# Altium PCB MCUBOARD_V1.PcbDoc (part 1 of 2)
Units mm, origin at the board's own origin, x right, y up, seen from the top; angles counter-clockwise.
Board outline 60 x 75 mm, 6 copper layers (GND-SIG1, SIG, GND, PWR, GND-1, GND-SIG2), stack 0.816 mm thick; 132 components, 125 nets, 546 pads, 166 vias.
Unrouted connection lines stored in the file: 93.
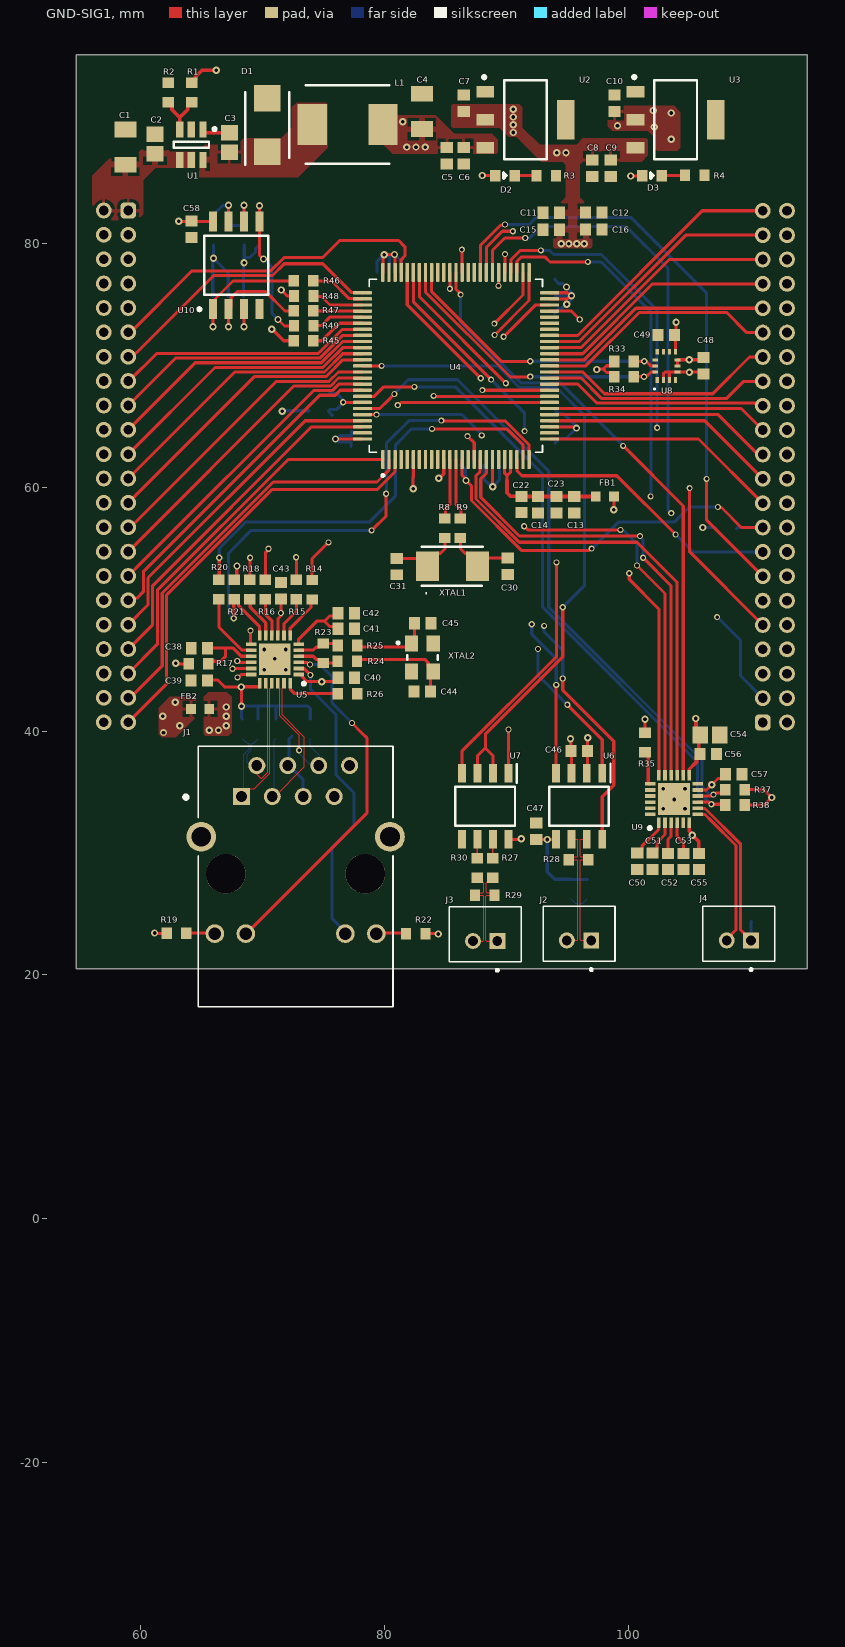
[diagram p0: GND-SIG1 view]
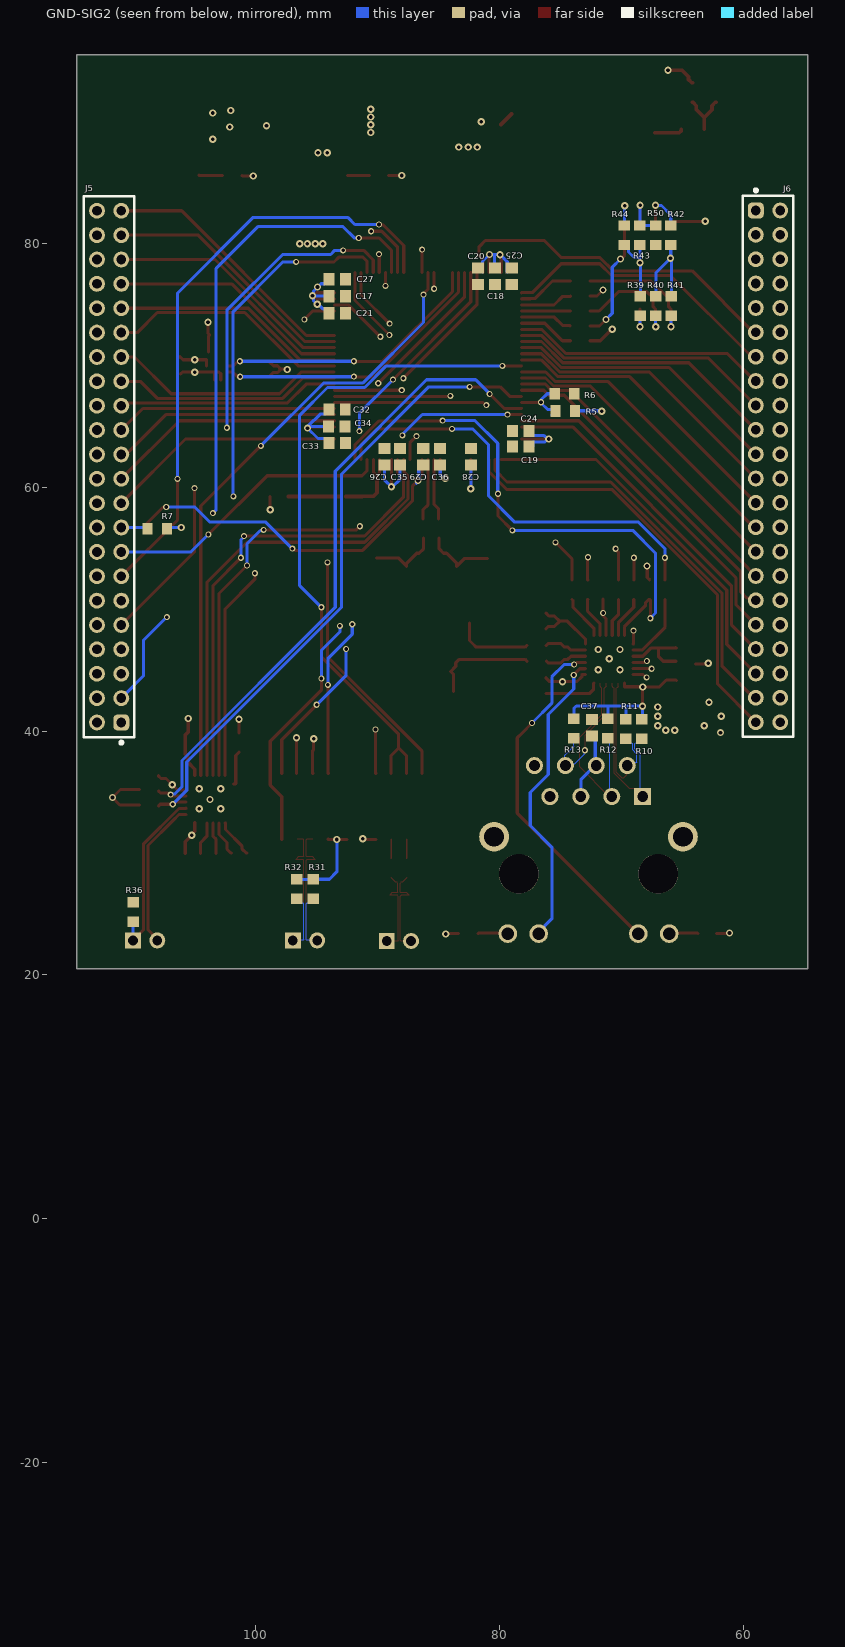
[diagram p1: GND-SIG2 view, seen from below]
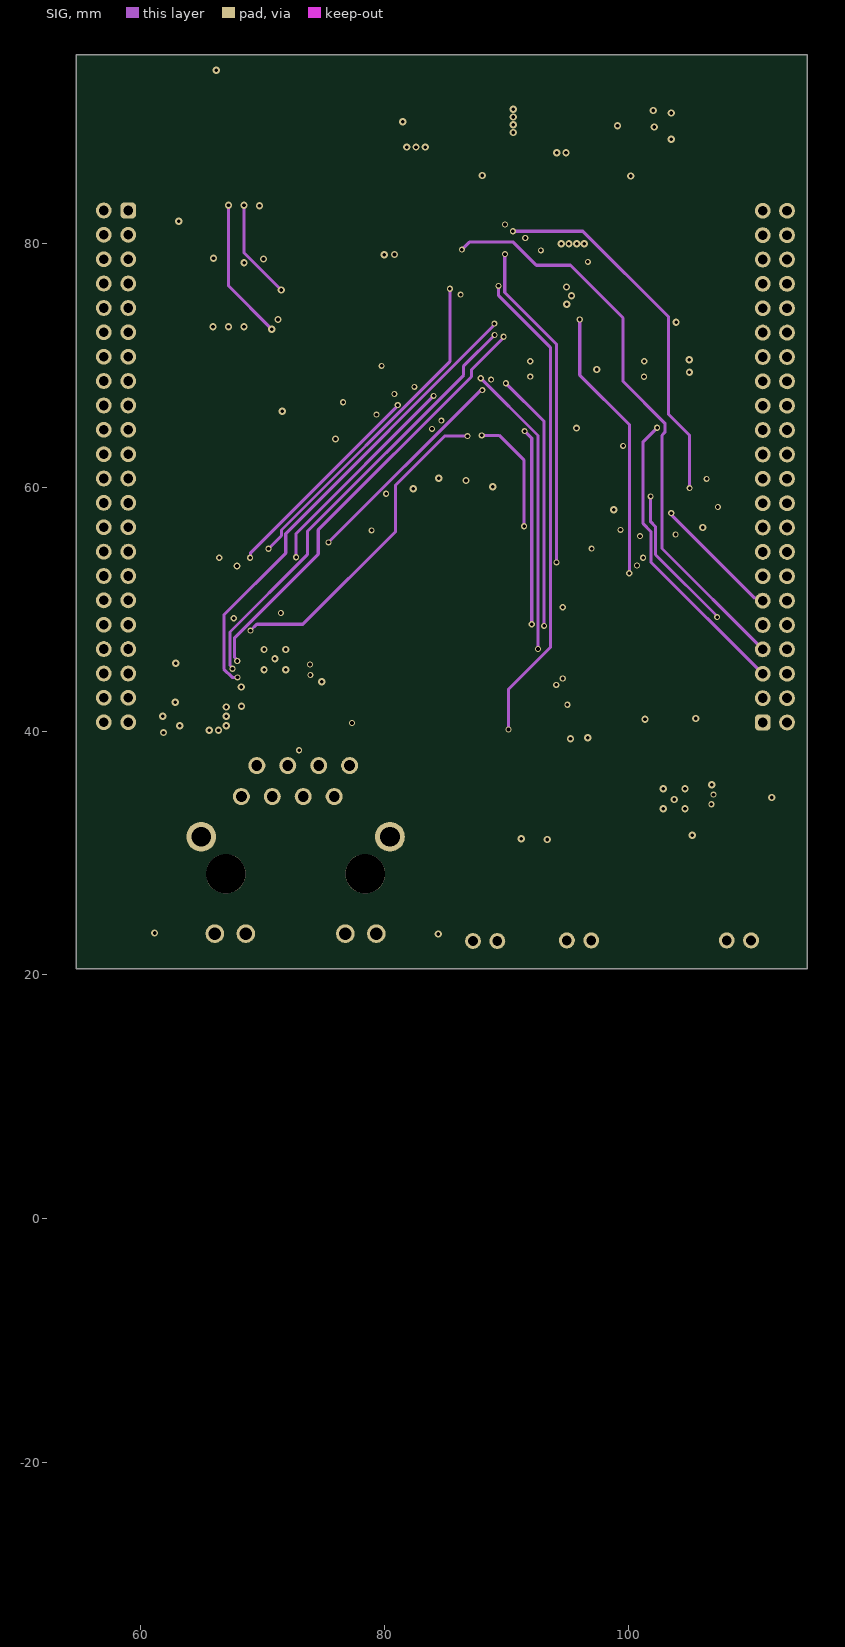
[diagram p2: SIG]
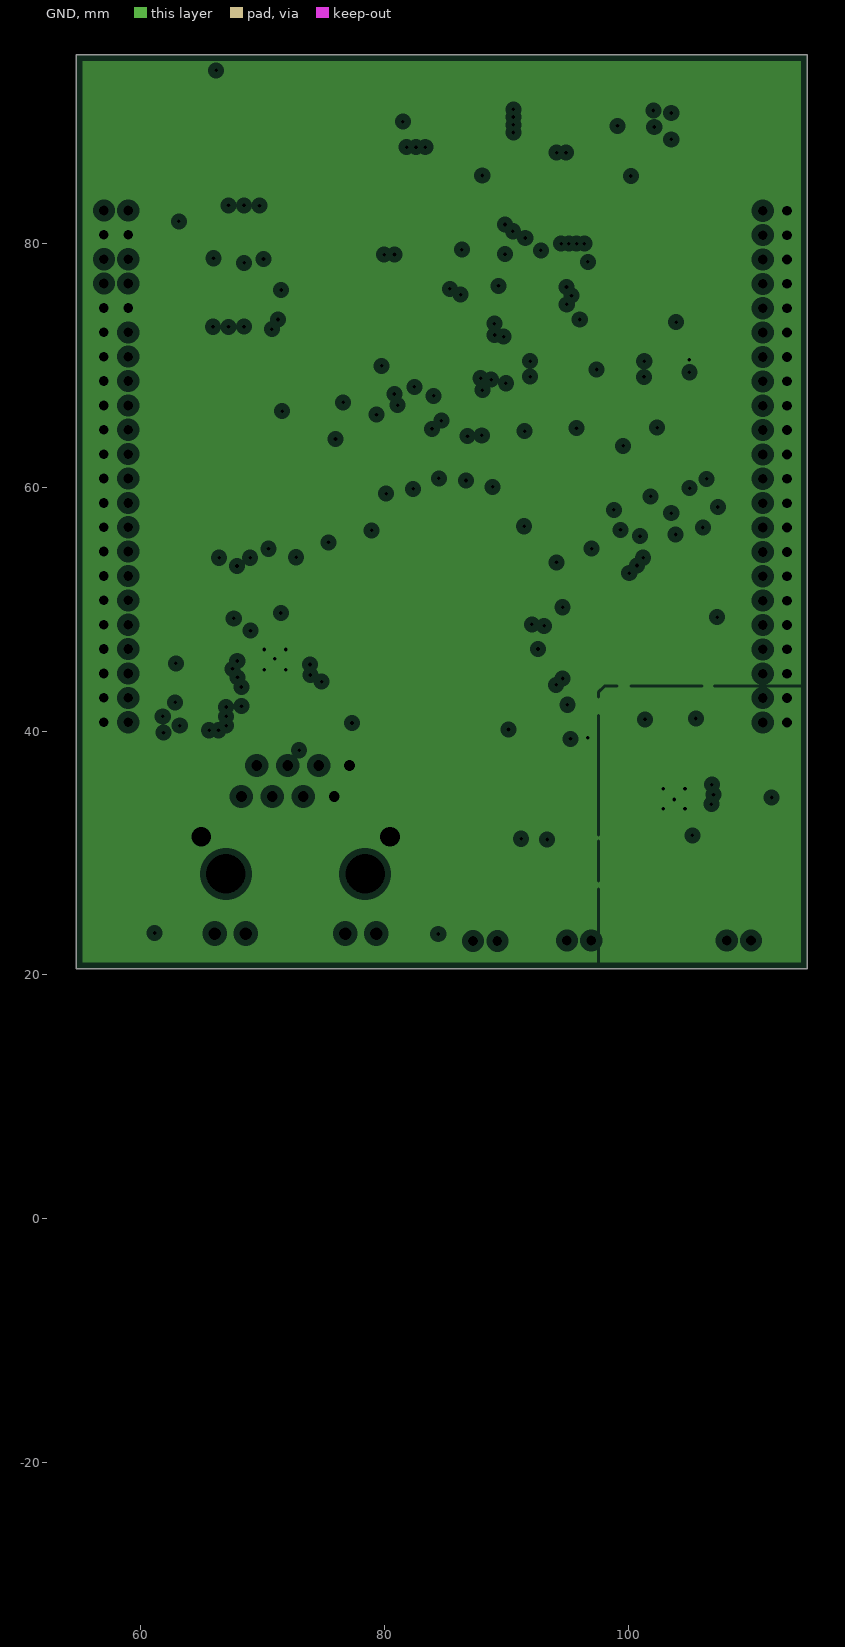
[diagram p3: GND, clearances drawn from the general rule]
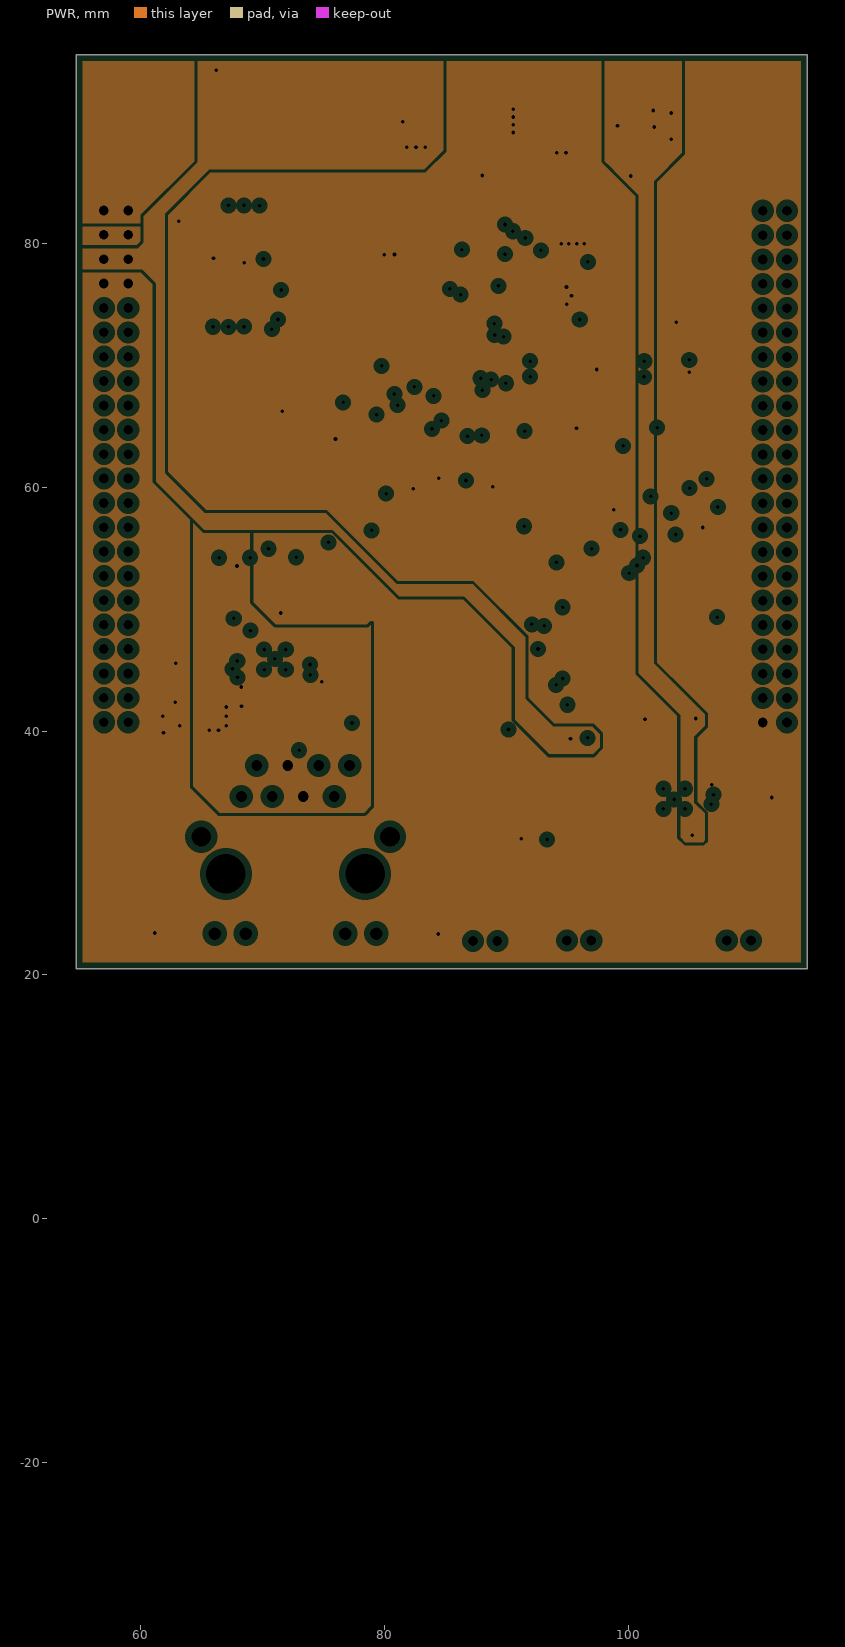
[diagram p4: PWR, clearances drawn from the general rule]
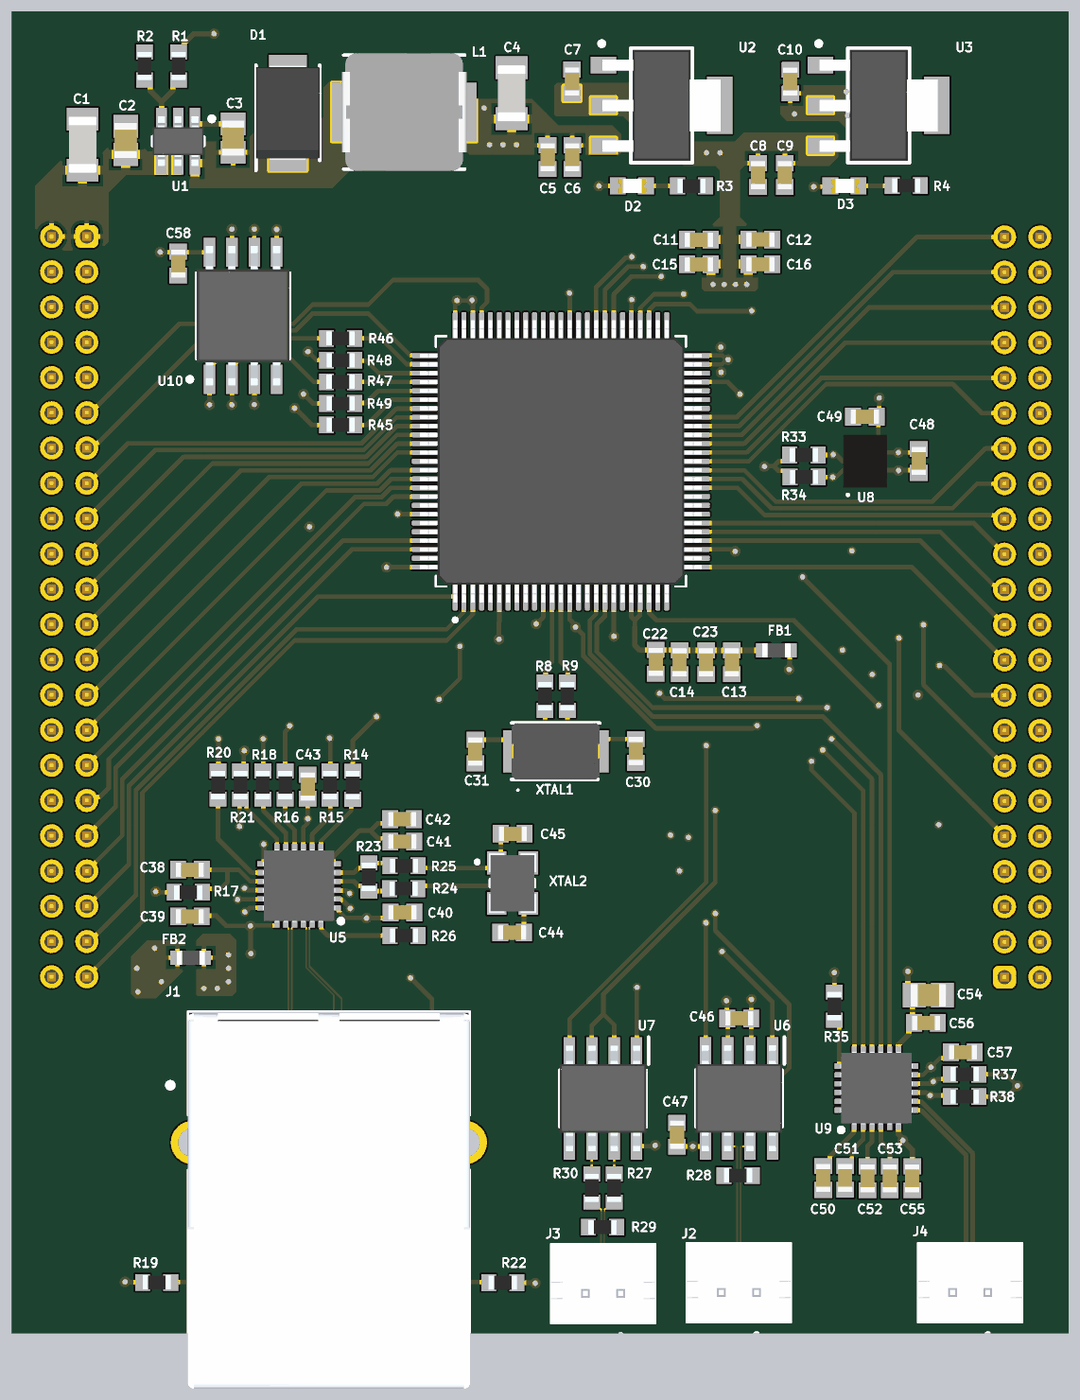
[diagram p6: 3D render of the assembled board from above, using the file's embedded part models]
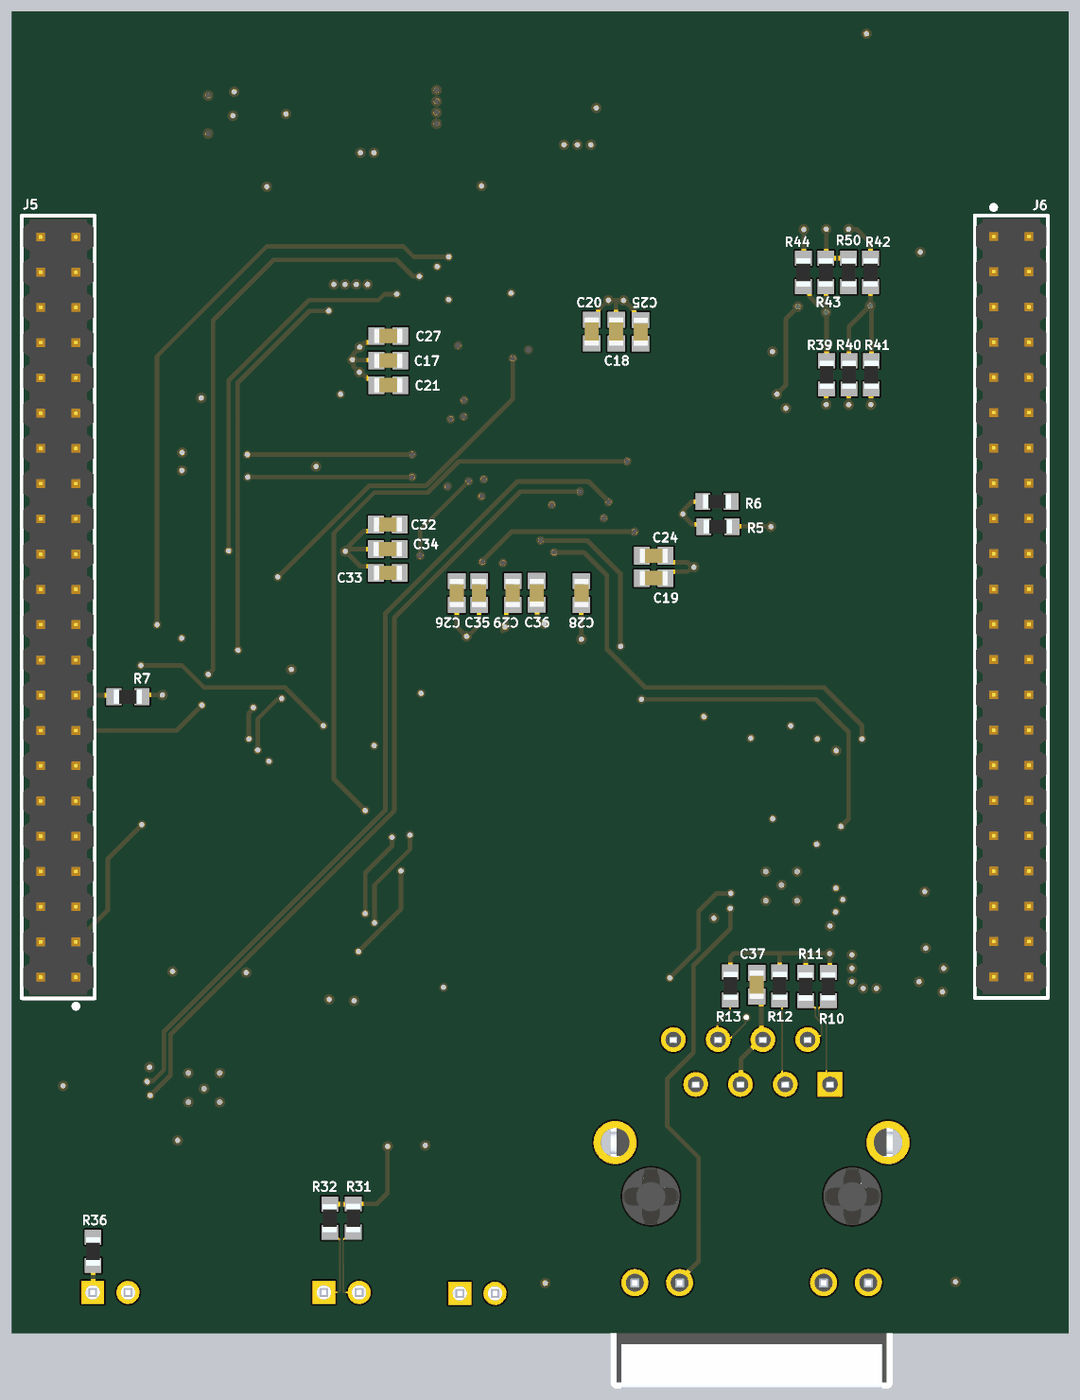
[diagram p7: 3D render of the assembled board from below, using the file's embedded part models]

## Layer stack, top to bottom
Top Solder: solder mask 0.0102, Solder Resist, Dk 3.5
GND-SIG1: signal copper 0.0356
Dielectric 2: prepreg 0.0711, PP-006, Dk 4.1
SIG: signal copper 0.035
Dielectric 4: prepreg 0.0711, PP-006, Dk 4.1
GND: plane copper 0.035, net GND
Dielectric 1: dielectric 0.32, FR-4, Dk 4.8
PWR: plane copper 0.035, net (Multiple Nets)
Dielectric 5: prepreg 0.0711, PP-006, Dk 4.1
GND-1: signal copper 0.035
Dielectric 3: prepreg 0.0711, PP-006, Dk 4.1
GND-SIG2: signal copper 0.0356
Bottom Solder: solder mask 0.0102, Solder Resist, Dk 3.5

## Board outline
54.681,20.504 54.681,95.504 114.681,95.504 114.681,20.504

## Design rules (kind name [scope] priority, off if disabled: settings)
Clearance [All] p1: gap=0.254 ignorepadtopadclearanceinfootprint=FALSE except(0: Arc-Hole Track-Hole SMDPad-Hole THPad-Hole Via-Hole Fill-Hole Poly-Hole Region-Hole Text-Hole; 0.09: Arc-Arc Arc-Track Arc-SMDPad Track-Track Track-SMDPad; 0.1: SMDPad-SMDPad; 0.127: Arc-Via Track-Via SMDPad-Via THPad-Via)
DiffPairsRouting [All] p1: maxlimit=0.127 minlimit=0.09 mostfreqgap=0.127 toplayer_maxgap=0.09 toplayer_prefgap=0.09 toplayer_minwidth=0.093 toplayer_maxwidth=0.093 toplayer_prefwidth=0.093 midlayer1_mingap=0.127 midlayer1_minwidth=0.043 midlayer1_maxwidth=0.043 midlayer1_prefwidth=0.043 midlayer2_mingap=0.127 midlayer2_minwidth=0.043 midlayer2_maxwidth=0.043 midlayer2_prefwidth=0.043 bottomlayer_maxgap=0.09 bottomlayer_prefgap=0.09 bottomlayer_minwidth=0.093 bottomlayer_maxwidth=0.093 bottomlayer_prefwidth=0.093 impedanceprofiledriven=TRUE impedanceprofileid={ACB21D5C-12C8-48E7-B30B-11AA4E9F73A1} impedanceprofilevalue=90.000000 maxuncoupledlength=12.7
HoleSize [All] p1: absolutevalues=TRUE maxlimit=4 minlimit=0.025 maxpercent=80.000 minpercent=20.000
MinimumSolderMaskSliver [All] p1: minsoldermaskwidth=0.001
PlaneClearance [All] p1: clearance=0.508
PlaneConnect [All] p1: planeconnectstyle=Relief reliefexpansion=0.508 reliefentries=4 reliefconductorwidth=0.254 reliefairgap=0.254
PolygonConnect [All] p1: connectstyle=Relief reliefconductorwidth=0.254 reliefentries=4 polygonreliefangle="90 Angle" airgapwidth=0.254
RoutingVias [All] p1: holewidth=0.3 width=0.6 viastyle="Through Hole" minholewidth=0.3 minwidth=0.4 maxholewidth=3 maxwidth=3
SilkToSilkClearance [All] p1: silktosilkclearance=0.15
SilkToSolderMaskClearance [IsPad] p1: minsilkscreentomaskgap=0.01 clearancetoexposedcopper=TRUE
SolderMaskExpansion [All] p1: expansion=0.102 istentingtop=FALSE
Width [All] p1: maxlimit=3 minlimit=0.09 preferedwidth=0.127
23 further rules are at their usual default settings.

## Classes and differential pairs
differential pair class RS485: RS485
differential pair class ETH_TX: ETHTX
differential pair class ETH_RX: ETHRX
differential pair class CAN: CAN
component class "MCU - IMU": C48 C49 R33 R34 U8
component class "MCU - FLASH": C58 R39 R40 R41 R42 R43 R44 R45 R46 R47 R48 R49 R50 U10
component class "MCU - CAN RS485": C46 C47 J2 J3 R27 R28 R29 R30 R31 R32 U6 U7
component class "MCU - AUDIO": C50 C51 C52 C53 C54 C55 C56 C57 J4 R35 R36 R37 R38 U9
component class "Ethernet - LAN8720A": C37 C38 C39 C40 C41 C42 C43 C44 C45 FB2 J1 R10 R11 R12 R13 R14 R15 R16 R17 R18 R19 R20 R21 R22 R23 R24 R25 R26 U5 XTAL2
component class "Connector - Carrier": J5 J6
component class "Power - Regulators": C1 C2 C3 C4 C5 C6 C7 C8 C9 C10 D1 D2 D3 L1 R1 R2 R3 R4 U1 U2 U3
component class "MCU - STM32F407VGT6": C11 C12 C13 C14 C15 C16 C17 C18 C19 C20 C21 C22 C23 C24 C25 C26 C27 C28 C29 C30 C31 C32 C33 C34 C35 C36 FB1 R5 R6 R7 R8 R9 U4 XTAL1
differential pair RS485: +RS485_P -RS485_N
differential pair ETHTX: +ETHTX_P -ETHTX_N
differential pair ETHRX: +ETHRX_P -ETHRX_N
differential pair CAN: +CAN_P -CAN_N

## Components (designator, comment, footprint, x,y, rotation, side; value= is the part's Value field where it differs from the comment)
C1 "4.7 µF 50V" 1206_10uF 58.801,87.884 r90 top
C2 "0.1µF" 0805 61.214,88.265 r270 top
C3 "0.1µF" 0805 67.31,88.392 r270 top
C4 "10µF 50V" 1206_10uF 83.144,90.802 r90 top
C5 "1µF" 0603_Footprint 85.09,87.249 r270 top
C6 "0.1µF" 0603_Footprint 86.487,87.249 r270 top
C7 "0.1µF" 0603_Footprint 86.477,91.547 r270 top
C8 "1µF" 0603_Footprint 97.028,86.233 r270 top
C9 "0.1µF" 0603_Footprint 98.552,86.233 r270 top
C10 "0.1µF" 0603_Footprint 98.861,91.541 r270 top
C11 "4.7µF" 0603_Footprint 93.706,82.56 r180 top
C12 "1µF" 0603_Footprint 97.155,82.55 r0 top
C13 "0.1µF" 0603_Footprint 95.546,58.595 r270 top
C14 "1µF" 0603_Footprint 92.582,58.595 r270 top
C15 "0.1µF" 0603_Footprint 93.706,81.163 r180 top
C16 "0.1µF" 0603_Footprint 97.155,81.153 r0 top
C17 "0.1µF" 0603_Footprint 93.325,75.682 r180 bottom
C18 "0.1µF" 0603_Footprint 80.378,77.356 r270 bottom
C19 "0.1µF" 0603_Footprint 78.223,63.359 r0 bottom
C20 "2.2µF" 0603_Footprint 81.766,77.359 r270 bottom
C21 "2.2µF" 0603_Footprint 93.325,74.285 r180 bottom
C22 "0.1µF" 0603_Footprint 91.223,58.618 r270 top
C23 "1µF" 0603_Footprint 94.081,58.595 r270 top
C24 "0.1µF" 0603_Footprint 78.223,64.629 r0 bottom
C25 "0.1µF" 0603_Footprint 78.994,77.343 r270 bottom
C26 "0.1µF" 0603_Footprint 89.408,62.484 r90 bottom
C27 "0.1µF" 0603_Footprint 93.325,77.079 r180 bottom
C28 "0.1µF" 0603_Footprint 82.328,62.484 r90 bottom
C29 "0.1µF" 0603_Footprint 86.233,62.484 r90 bottom
C30 "18pF" 0603_Footprint 90.089,53.56 r270 top
C31 "18pF" 0603_Footprint 80.989,53.527 r270 top
C32 "0.1µF" 0603_Footprint 93.348,66.378 r180 bottom
C33 "0.1µF" 0603_Footprint 93.345,63.627 r180 bottom
C34 "0.1µF" 0603_Footprint 93.356,64.987 r180 bottom
C35 "0.1µF" 0603_Footprint 88.138,62.484 r90 bottom
C36 "0.1µF" 0603_Footprint 84.869,62.495 r90 bottom
C37 "22nF" 0603_Footprint 72.39,40.259 r90 bottom
C38 "0.1µF" 0603_Footprint 64.82,46.816 r180 top
C39 "0.1µF" 0603_Footprint 64.815,44.162 r180 top
C40 "0.1µF" 0603_Footprint 76.842,44.367 r0 top
C41 "470pF" 0603_Footprint 76.835,48.387 r0 top
C42 "1µF" 0603_Footprint 76.862,49.683 r180 top
C43 "0.1µF" 0603_Footprint 71.492,51.5 r90 top
C44 "18pF" 0603_Footprint 83.103,43.25 r180 top
C45 "18pF" 0603_Footprint 83.103,48.838 r0 top
C46 "0.1µF" 0603_Footprint 95.955,38.359 r0 top
C47 "0.1µF" 0603_Footprint 92.456,31.75 r90 top
C48 "0.1µF" 0603_Footprint 106.172,69.977 r90 top
C49 "0.1µF" 0603_Footprint 103.124,72.517 r180 top
C50 "2.2µF" 0603_Footprint 100.748,29.296 r90 top
C51 "1µF" 0603_Footprint 101.981,29.337 r270 top
C52 "1µF" 0603_Footprint 103.241,29.317 r270 top
C53 "2.2µF" 0603_Footprint 104.531,29.277 r90 top
C54 "10µF" 0805 106.63,39.746 r0 top
C55 "0.1µF" 0603_Footprint 105.781,29.317 r270 top
C56 "1µF" 0603_Footprint 106.553,38.1 r0 top
C57 "1µF" 0603_Footprint 108.648,36.448 r0 top
C58 "0.1µF" 0603_Footprint 64.125,81.213 r270 top
D1 "SS26-E3_52T" DIOM5436X244N 70.358,89.748 r90 top
D2 "LTST-C190KRKT" LEDC1608X80N 89.878,85.598 r180 top
D3 "LTST-C190KRKT" LEDC1608X80N 101.943,85.598 r180 top
FB1 "CB2012-121Y-N" Inductor-0603 98.081,59.248 r0 top
FB2 "CB2012-121Y-N" Inductor-0603 64.846,41.817 r180 top
J1 "HR911105A" HANRUN_HR911105A 72.687,28.278 r180 top
J2 "B2B-PH-K-S" JST_B2B-PH-K-S 95.955,23.373 r0 top
J3 "B2B-PH-K-S" JST_B2B-PH-K-S 88.248,23.319 r0 top
J4 "B2B-PH-K-S" JST_B2B-PH-K-S 109.077,23.373 r0 top
J5 "62004421121" 62004421121 112.03,61.708 r90 bottom
J6 "62004421121" 62004421121 57.95,61.731 r270 bottom
L1 "IHLP2525CZER220M8A" INDPM6965X300N 76.962,89.789 r0 top
R1 "49.9 kOhms" 0603_RES 64.135,92.456 r90 top
R2 "9.53 kOhms" 0603_RES 62.252,92.356 r270 top
R3 "330 Ohms" 0603_RES 93.218,85.575 r180 top
R4 "330 Ohms" 0603_RES 105.403,85.598 r180 top
R5 "0 Ohms" 0603_RES 74.549,66.294 r180 bottom
R6 "0 Ohms" 0603_RES 74.699,67.671 r0 bottom
R7 "4.7 kOhms" 0603_RES 108.031,56.642 r180 bottom
R8 "0 Ohms" 0603_RES 84.926,56.702 r90 top
R9 "0 Ohms" 0603_RES 86.196,56.702 r90 top
R10 "49.9 Ohms" 0603_RES 68.353,40.233 r90 bottom
R11 "49.9 Ohms" 0603_RES 69.643,40.228 r90 bottom
R12 "49.9 Ohms" 0603_RES 71.12,40.259 r90 bottom
R13 "49.9 Ohms" 0603_RES 73.914,40.259 r90 bottom
R14 "10 Ohms" 0603_RES 74.064,51.55 r270 top
R15 "10 Ohms" 0603_RES 72.771,51.562 r270 top
R16 "10 Ohms" 0603_RES 70.231,51.562 r270 top
R17 "4.7 kOhms" 0603_RES 64.659,45.498 r180 top
R18 "10 Ohms" 0603_RES 68.961,51.562 r270 top
R19 "330 Ohms" 0603_RES 62.865,23.368 r180 top
R20 "33 Ohms" 0603_RES 66.421,51.562 r270 top
R21 "1.5 kOhms" 0603_RES 67.691,51.562 r270 top
R22 "330 Ohms" 0603_RES 82.606,23.399 r0 top
R23 "1 MOhms" 0603_RES 74.974,46.343 r270 top
R24 "10 Ohms" 0603_RES 76.978,45.754 r0 top
R25 "0 Ohms" 0603_RES 76.902,47.005 r180 top
R26 "12.1 kOhms" 0603_RES 76.902,43.048 r180 top
R27 "10 Ohms" 0603_RES 88.9,28.702 r270 top
R28 "120 Ohms" 0603_RES 95.957,29.479 r0 top
R29 "100 Ohms" 0603_RES 88.265,26.543 r0 top
R30 "10 Ohms" 0603_RES 87.63,28.702 r270 top
R31 "60 Ohms" 0603_RES 95.313,27.094 r90 bottom
R32 "60 Ohms" 0603_RES 96.604,26.984 r270 bottom
R33 "10 kOhms" 0603_RES 99.695,70.358 r0 top
R34 "10 kOhms" 0603_RES 99.607,69.065 r180 top
R35 "10 kOhms" 0603_RES 101.346,39.116 r90 top
R36 "0 Ohms" 0603_RES 110.036,25.102 r270 bottom
R37 "1.5 kOhms" 0603_RES 108.712,35.179 r180 top
R38 "1.5 kOhms" 0603_RES 108.712,33.909 r180 top
R39 "4.7 kOhms" 0603_RES 68.453,74.93 r90 bottom
R40 "4.7 kOhms" 0603_RES 67.183,74.93 r90 bottom
R41 "4.7 kOhms" 0603_RES 65.913,74.93 r90 bottom
R42 "4.7 kOhms" 0603_RES 65.913,80.645 r270 bottom
R43 "4.7 kOhms" 0603_RES 68.453,80.645 r270 bottom
R44 "4.7 kOhms" 0603_RES 69.723,80.645 r270 bottom
R45 "49.9 kOhms" 0603_RES 73.402,72.064 r0 top
R46 "49.9 kOhms" 0603_RES 73.302,76.926 r180 top
R47 "49.9 kOhms" 0603_RES 73.3,74.463 r180 top
R48 "49.9 kOhms" 0603_RES 73.405,75.732 r0 top
R49 "49.9 kOhms" 0603_RES 73.406,73.279 r0 top
R50 "4.7 kOhms" 0603_RES 67.205,80.745 r90 bottom
U1 "AOZ1282CI" SOT95P280X125-6N 64.135,88.138 r270 top
U2 "AMS1117-3.3" SOT229P700X180-4N 91.567,90.17 r0 top
U3 "AMS1117-1.8" SOT229P700X180-4N 103.886,90.17 r0 top
U4 "STM32F407VGT6" QFP50P1600X1600X160-100N 85.854,69.975 r90 top
U5 "LAN8720ACP" QFN50P400X400X100-25N-D 70.989,45.892 r180 top
U6 "TJA1042T_1J" SOIC127P600X175-8N 95.955,33.832 r270 top
U7 "SN65HVD10DR" SOIC127P600X175-8N 88.246,33.827 r270 top
U8 "LSM6DSOTR" LGA-14(2.5X3X0.86) 103.124,69.977 r90 top
U9 "MAX9860ETG+T" QFN50P400X400X80-25N 103.759,34.417 r90 top
U10 "W25Q16JVSSIQ_TR" SOIC127P790X216-8N 67.818,78.232 r90 top
XTAL1 "ABM3-8.000MHZ-D2Y-T" ABM3 85.561,53.527 r0 top
XTAL2 "ECS-250-18-33-JGN-TR" ECS2501833JGNTR 83.103,46.044 r270 top

## Footprints (in the part's own frame and the unit in brackets; to place one, negate y for a bottom-side part, rotate by r counter-clockwise, add the part's x,y. Pads: shape width x height; smd on the part's side, far side on the other; paste and mask are expansions set on the pad)
0603_Footprint [mm]
  rect 0.9x1 smd: 1(-0.655,0.01) 2(0.695,0.01)
  body extent -0.78,-0.4 0.82,0.42, height 0.82
0603_RES [mm]
  rect 0.85x0.95 smd: 1(-0.85,-0.023) 2(0.75,-0.023)
  body extent -0.85,-0.42 0.75,0.38, height 0.55
0805 [mm]
  rect 1.3x1.4 smd: 1(-0.721,-0.06) 2(0.879,-0.06)
  body extent -0.92,-0.7 1.08,0.58, height 1.26
1206_10uF [mm]
  rect 1.3x1.8 smd: 1(-1.394,0.086) 2(1.506,0.086)
  body extent -1.54,-0.71 1.66,0.89, height 0.8
62004421121 [mm] "2.00 mm THT Dual Pin Header, 44p"
  rrect50% 1.3x1.3 hole 0.8: 1(-21,-1)
  round 1.3 hole 0.8: 2(-21,1) 3(-19,-1) 4(-19,1) 5(-17,-1) 6(-17,1) 7(-15,-1) 8(-15,1) 9(-13,-1) 10(-13,1) 11(-11,-1) 12(-11,1) 13(-9,-1) 14(-9,1) 15(-7,-1) 16(-7,1) 17(-5,-1) 18(-5,1) 19(-3,-1) 20(-3,1) 21(-1,-1) 22(-1,1) 23(1,-1) 24(1,1) 25(3,-1) 26(3,1) 27(5,-1) 28(5,1) 29(7,-1) 30(7,1) 31(9,-1) 32(9,1) 33(11,-1) 34(11,1) 35(13,-1) 36(13,1) 37(15,-1) 38(15,1) 39(17,-1) 40(17,1) 41(19,-1) 42(19,1) 43(21,-1) 44(21,1)
  silkscreen extent -22.77,-2.07 22.2,2.07, body extent -22,-2 22,2, height 6.05
ABM3 [mm]
  rect 1.9x2.4 smd: 1(-2.05,0) 2(2.05,0)
  silkscreen extent -2.5,-2.25 2.5,1.6, body extent -2.5,-1.6 2.5,1.6, height 1.3
DIOM5436X244N [mm]
  rect 2.2x2.15 smd: 1(-2.2,0) 2(2.2,0)
  silkscreen extent -3.27,-1.81 2.7,1.81, body extent -2.7,-1.81 2.7,1.81, height 2.44
ECS2501833JGNTR [mm]
  rect 1.3x1.1 smd: 1(-1.15,-0.9) 2(1.15,-0.9) 3(1.15,0.9) 4(-1.15,0.9)
  silkscreen extent -1.3,-2.1 0.2,1.25, body extent -1.69,-1.34 1.69,1.34, height 0.9
HANRUN_HR911105A [mm]
  rect 1.398x1.398 / inner round 1.398 / far side rect 1.398x1.398 hole 0.89: 1(4.45,-6.35)
  round 1.398 hole 0.89: 2(3.18,-8.89) 3(1.91,-6.35) 4(0.64,-8.89) 5(-0.63,-6.35) 6(-1.9,-8.89) 7(-3.17,-6.35) 8(-4.44,-8.89)
  round 1.53 hole 1.02: 9(6.625,4.9) 10(4.085,4.9) 11(-4.085,4.9) 12(-6.625,4.9)
  round 2.445 hole 1.63: 15(7.745,-3.05) 16(-7.745,-3.05)
  round 3.25 hole 3.25 unplated: ""(-5.715,0) ""(5.715,0)
  silkscreen extent -8,-10.48 9.15,10.92, body extent -8.02,-10.38 8.02,10.92, height 13.5
INDPM6965X300N [mm]
  rect 2.4x3.35 smd: 1(-2.9,0) 2(2.9,0)
  silkscreen extent -3.43,-3.23 3.43,3.23, body extent -3.54,-3.33 3.53,3.34, height 2.89
Inductor-0603 [mm]
  rect 0.8x0.8 smd: 1(-0.75,0) 2(0.75,0)
  body extent -0.8,-0.4 0.8,0.4, height 0.55
JST_B2B-PH-K-S [mm]
  rect 1.308x1.308 / inner round 1.308 / far side rect 1.308x1.308 hole 0.8: 1(1,-0.55)
  round 1.308 hole 0.8: 2(-1,-0.55)
  silkscreen extent -2.95,-3.05 2.95,2.25, body extent -2.95,-2.25 2.95,2.25, height 6
LEDC1608X80N [mm]
  rect 0.9x0.95 smd: 1(-0.8,0) 2(0.8,0)
  silkscreen extent -0.13,-0.25 0.13,0.25, body extent -0.83,-0.4 0.77,0.4, height 0.8
LGA-14(2.5X3X0.86) [mm]
  rect 0.475x0.25 smd: 1(-1.162,0.75) 2(-1.162,0.25) 3(-1.162,-0.25) 4(-1.162,-0.75) 8(1.162,-0.75) 9(1.162,-0.25) 10(1.162,0.25) 11(1.162,0.75)
  rect 0.25x0.475 smd: 5(-0.5,-0.913) 6(0,-0.913) 7(0.5,-0.913) 12(0.5,0.913) 13(0,0.913) 14(-0.5,0.913)
  silkscreen extent -1.93,0.95 -1.88,1.01, body extent -1.5,-1.25 1.5,1.25, height 0.86
QFN50P400X400X80-25N [mm]
  rect 0.85x0.3 smd: 1(-1.95,1.25) 2(-1.95,0.75) 3(-1.95,0.25) 4(-1.95,-0.25) 5(-1.95,-0.75) 6(-1.95,-1.25) 13(1.95,-1.25) 14(1.95,-0.75) 15(1.95,-0.25) 16(1.95,0.25) 17(1.95,0.75) 18(1.95,1.25)
  rect 0.3x0.85 smd: 7(-1.25,-1.95) 8(-0.75,-1.95) 9(-0.25,-1.95) 10(0.25,-1.95) 11(0.75,-1.95) 12(1.25,-1.95) 19(1.25,1.95) 20(0.75,1.95) 21(0.25,1.95) 22(-0.25,1.95) 23(-0.75,1.95) 24(-1.25,1.95)
  rect 2.63x2.63 smd: 25(0,0)
  silkscreen extent -2.5,1.88 -2.25,2.12, body extent -2.05,-2.05 2.05,2.05, height 0.8
QFN50P400X400X100-25N-D [mm]
  rect 0.85x0.3 smd: 1(-1.95,1.25) 2(-1.95,0.75) 3(-1.95,0.25) 4(-1.95,-0.25) 5(-1.95,-0.75) 6(-1.95,-1.25) 13(1.95,-1.25) 14(1.95,-0.75) 15(1.95,-0.25) 16(1.95,0.25) 17(1.95,0.75) 18(1.95,1.25)
  rect 0.3x0.85 smd: 7(-1.25,-1.95) 8(-0.75,-1.95) 9(-0.25,-1.95) 10(0.25,-1.95) 11(0.75,-1.95) 12(1.25,-1.95) 19(1.25,1.95) 20(0.75,1.95) 21(0.25,1.95) 22(-0.25,1.95) 23(-0.75,1.95) 24(-1.25,1.95)
  rect 2.6x2.6 smd: 25(0,0)
  silkscreen extent -2.5,1.88 -2.25,2.12, body extent -2.05,-2.05 2.05,2.05, height 1
QFP50P1600X1600X160-100N [mm]
  rrect50% 1.56x0.28 smd: 1(-7.68,6) 2(-7.68,5.5) 3(-7.68,5) 4(-7.68,4.5) 5(-7.68,4) 6(-7.68,3.5) 7(-7.68,3) 8(-7.68,2.5) 9(-7.68,2) 10(-7.68,1.5) 11(-7.68,1) 12(-7.68,0.5) 13(-7.68,0) 14(-7.68,-0.5) 15(-7.68,-1) 16(-7.68,-1.5) 17(-7.68,-2) 18(-7.68,-2.5) 19(-7.68,-3) 20(-7.68,-3.5) 21(-7.68,-4) 22(-7.68,-4.5) 23(-7.68,-5) 24(-7.68,-5.5) 25(-7.68,-6) 51(7.68,-6) 52(7.68,-5.5) 53(7.68,-5) 54(7.68,-4.5) 55(7.68,-4) 56(7.68,-3.5) 57(7.68,-3) 58(7.68,-2.5) 59(7.68,-2) 60(7.68,-1.5) 61(7.68,-1) 62(7.68,-0.5) 63(7.68,0) 64(7.68,0.5) 65(7.68,1) 66(7.68,1.5) 67(7.68,2) 68(7.68,2.5) 69(7.68,3) 70(7.68,3.5) 71(7.68,4) 72(7.68,4.5) 73(7.68,5) 74(7.68,5.5) 75(7.68,6)
  rrect50% 0.28x1.56 smd: 26(-6,-7.68) 27(-5.5,-7.68) 28(-5,-7.68) 29(-4.5,-7.68) 30(-4,-7.68) 31(-3.5,-7.68) 32(-3,-7.68) 33(-2.5,-7.68) 34(-2,-7.68) 35(-1.5,-7.68) 36(-1,-7.68) 37(-0.5,-7.68) 38(0,-7.68) 39(0.5,-7.68) 40(1,-7.68) 41(1.5,-7.68) 42(2,-7.68) 43(2.5,-7.68) 44(3,-7.68) 45(3.5,-7.68) 46(4,-7.68) 47(4.5,-7.68) 48(5,-7.68) 49(5.5,-7.68) 50(6,-7.68) 76(6,7.68) 77(5.5,7.68) 78(5,7.68) 79(4.5,7.68) 80(4,7.68) 81(3.5,7.68) 82(3,7.68) 83(2.5,7.68) 84(2,7.68) 85(1.5,7.68) 86(1,7.68) 87(0.5,7.68) 88(0,7.68) 89(-0.5,7.68) 90(-1,7.68) 91(-1.5,7.68) 92(-2,7.68) 93(-2.5,7.68) 94(-3,7.68) 95(-3.5,7.68) 96(-4,7.68) 97(-4.5,7.68) 98(-5,7.68) 99(-5.5,7.68) 100(-6,7.68)
  silkscreen extent -9.1,-7.1 7.1,7.1, body extent -8,-8 8,8, height 1.59
SOIC127P600X175-8N [mm]
  rect 1.525x0.65 smd: 1(-2.712,1.905) 2(-2.712,0.635) 3(-2.712,-0.635) 4(-2.712,-1.905) 5(2.712,-1.905) 6(2.712,-0.635) 7(2.712,0.635) 8(2.712,1.905)
  silkscreen extent -3.47,-2.45 1.6,2.58, body extent -3,-2.45 3,2.45, height 1.75
SOIC127P790X216-8N [mm]
  rect 1.65x0.65 smd: 1(-3.6,1.905) 2(-3.6,0.635) 3(-3.6,-0.635) 4(-3.6,-1.905) 5(3.6,-1.905) 6(3.6,-0.635) 7(3.6,0.635) 8(3.6,1.905)
  silkscreen extent -3.73,-2.64 2.42,3.15, body extent -3.95,-2.64 3.95,2.64, height 2.16
SOT95P280X125-6N [mm]
  rect 1.3x0.6 smd: 1(-1.25,0.95) 2(-1.25,0) 3(-1.25,-0.95) 4(1.25,-0.95) 5(1.25,0) 6(1.25,0.95)
  silkscreen extent -1.4,-1.45 0.25,2.03, body extent -1.4,-1.45 1.4,1.45, height 1.25
SOT229P700X180-4N [mm]
  rect 1.45x0.95 smd: 1(-3.3,2.29) 2(-3.3,0) 3(-3.3,-2.29)
  rect 1.45x3.25 smd: 4(3.3,0)
  silkscreen extent -3.53,-3.25 1.75,3.63, body extent -3.35,-3.15 3.35,3.15, height 1.8

## Part data
C1: library part "4.7 uF 50V 1206", "10 uF 50V 1206"
C2 C3: library part "0.1uF 0805 Surface Capacitor", "0.1uF 0805 Surface Capacitor"
C4: library part "10 uF 50V 1206", "10 uF 50V 1206"
C5 C8 C12 C14 C23 C42 C51 C52 C56 C57: library part "1uF 0603 Surface Capacitor", "1uF 0603 Surface Capacitor"
C6 C7 C9 C10 C13 C15 C16 C17 C18 C19 C22 C24 C25 C26 C27 C28 C29 C32 C33 C34 C35 C36 C46 C47 C58: library part "0.1uF 0603 Surface Capacitor", "0.1uF 0603 Surface Capacitor"
C11: library part "4.7uF 0603 Surface Capacitor", "4.7uF 0603 Surface Capacitor"
C20 C21 C50 C53: library part "2.2uF 0603 Surface Capacitor", "2.2uF 0603 Surface Capacitor"
C30 C31 C44 C45: library part "18pF 0603 Surface Capacitor", "18pF 0603 Surface Capacitor"
C37: library part "22nF 0603", "22nF 0603 Surface Capacitor"
C38 C39 C40 C43 C48 C49 C55: library part "0.1uF 0603 Surface Capacitor_1_1_1_1_1_1", "0.1uF 0603 Surface Capacitor"
C41: library part "470 pF 0603 Surface Capacitor", "470 pF 0603 Surface Capacitor"
C54: library part "10uF 0805 Surface Capacitor", "10uF 0805 Surface Capacitor"
D1: "Schottky Diode", Arrow Part Number=SS26-E3/52T, Manufacturer_Name=Vishay, Mouser Part Number=625-SS26-E3, Arrow Price/Stock=https://www.arrow.com/en/products/ss26-e352t/vishay?region=europe, Datasheet Link=https://componentsearchengine.com/Datasheets/2/SS26-E3_52T.pdf, Height=2.44mm, Manufacturer_Part_Number=SS26-E3/52T, Mouser Price/Stock=https://www.mouser.co.uk/ProductDetail/Vishay-General-Semiconductor/SS26-E3-52T?qs=x2jpVgRnAtNToatHaCRUvw%3D%3D
D2 D3: "LED", Manufacturer_Name=Lite-On, Mouser Part Number=859-LTST-C190KRKT, Arrow Part Number=LTST-C190KRKT, Arrow Price/Stock=https://www.arrow.com/en/products/ltst-c190krkt/lite-on-technology?region=europe, Datasheet Link=https://componentsearchengine.com/Datasheets/1/LTST-C190KRKT.pdf, Height=0.8mm, Manufacturer_Part_Number=LTST-C190KRKT, Mouser Price/Stock=https://www.mouser.co.uk/ProductDetail/Lite-On/LTST-C190KRKT?qs=kAD5fFa1n5VY3YYNWPC1Fg%3D%3D
J1: "DIP RJ45 Connector;", Package=None, Availability="Not in stock", Check_prices=https://www.snapeda.com/parts/HR911105A/HanRun/view-part/?ref=eda, MF=hanrun, MP=HR911105A, Price=None, SnapEDA_Link=https://www.snapeda.com/parts/HR911105A/HanRun/view-part/?ref=snap
J2 J3 J4: "Connector Header Through Hole 2 position 0.079 (2.00mm)", Package=None, Check_prices=https://www.snapeda.com/parts/B2B-PH-K-S/JST/view-part/?ref=eda, MF="JST Sales America Inc.", MP=B2B-PH-K-S, SnapEDA_Link=https://www.snapeda.com/parts/B2B-PH-K-S/JST/view-part/?ref=snap
J5 J6: "WR-PHD Pin Header, THT, Vertical, pitch 2mm, 2 Row, 44P", Contact Resistance=20mOhm, Manufacturer="Wurth Elektronik", Operating Temperature Max=105°C, Operating Temperature Min=-40°C, Rated Current=2A, Withstanding Voltage=500V, Working Voltage=200V, Category="Board-to-Board Connectors", ComponentLink1Description="Website Link", ComponentLink1URL=https://www.we-online.com/redexpert/article/62004421121?ad, ComponentLink2Description="Datasheet Link", ComponentLink2URL=https://www.we-online.com/redexpert/spec/62004421121?ad, Gender="Pin Header", Manufacturer Part Number=62004421121, Match Code=WR-PHD, Mount="Through Hole", Number of Pins=44, Number of Rows=2, Orientation=Vertical, Packaging=Bag, Pitch=2mm
L1: "Inductor", Manufacturer_Name=Vishay, Mouser Part Number=70-IHLP2525CZR220M8A, Arrow Part Number=IHLP2525CZER220M8A, Arrow Price/Stock=https://www.arrow.com/en/products/ihlp2525czer220m8a/vishay, Datasheet Link=https://componentsearchengine.com/Datasheets/2/IHLP2525CZER220M8A.pdf, Height=3mm, Manufacturer_Part_Number=IHLP2525CZER220M8A, Mouser Price/Stock=https://www.mouser.co.uk/ProductDetail/Vishay-Dale/IHLP2525CZER220M8A?qs=ei%2FvZTf36ZyKyW60gc1ORQ%3D%3D
R1 R45 R46 R47 R48 R49: library part "49.9 kOhms 0603", "49.9 kOhms 0603"
R2: library part "9.53 kOhms 0603", "9.53 kOhms 0603"
R3 R4 R19 R22: library part "330 Ohm 0603", "330 Ohm 0603"
R5 R6 R8 R9 R25 R36: library part "0 Ohm 0603", "0 Ohm 0603"
R7 R17 R39 R40 R41 R42 R43 R44 R50: library part "4.7 kOhms 0603", "4.7 kOhms 0603"
R10 R11 R12 R13: library part "49.9 Ohms 0603", "49.9 Ohms 0603"
R14 R15 R16 R18 R24 R27 R30: library part "10 Ohm 0603", "10 Ohms 0603"
R20: library part "33 Ohm 0603", "33 Ohm 0603"
R21 R37 R38: library part "1.5 kOhms 0603", "1.5 kOhms 0603"
R23: library part "1 MOhms 0603", "1 MOhms 0603"
R26: library part "12.1 kOhms 0603", "12.1 kOhms 0603"
R28: library part "120 Ohm 0603", "120 Ohm 0603"
R29: library part "100 Ohm 0603", "100 Ohm 0603"
R31 R32: library part "60 Ohm 0603", "60 Ohm 0603"
R33 R34 R35: library part "10 kOhms 0603", "10 kOhms 0603"
U1: "Integrated Circuit", Manufacturer_Name="Alpha & Omega Semiconductors", Arrow Part Number=AOZ1282CI, Arrow Price/Stock=https://www.arrow.com/en/products/aoz1282ci/alpha-and-omega-semiconductor?region=nac, Datasheet Link=http://www.aosmd.com/res/data_sheets/AOZ1282CI.pdf, Height=1.25mm, Manufacturer_Part_Number=AOZ1282CI
U2: "Integrated Circuit", Manufacturer_Name=Advanced, Datasheet Link=https://datasheet.datasheetarchive.com/originals/distributors/Datasheets-28/DSA-550594.pdf, Height=1.8mm, Manufacturer_Part_Number=AMS1117-3.3
U3: "Integrated Circuit", Manufacturer_Name="Advanced Monolithic Systems", Datasheet Link=https://datasheet.datasheetarchive.com/originals/distributors/Datasheets-1/DSA-6085.pdf, Height=1.8mm, Manufacturer_Part_Number=AMS1117-1.8
U4: "STM32 Series 32-bit 1 MB Flash 192 kB RAM ARM Based Microcontroller - LQFP-100", Package=None, Availability=Unavailable, MP=STM32F407VGT6, Price=None
U5: "Ethernet Transreceiver", Manufacturer_Name=Microchip, Datasheet Link=http://ww1.microchip.com/downloads/en/DeviceDoc/8720a.pdf, Height=1mm, Manufacturer_Part_Number=LAN8720ACP
U6: "Integrated Circuit", Arrow Part Number=TJA1042T/1J, Manufacturer_Name=NXP, Mouser Part Number=771-TJA1042T/1J, Arrow Price/Stock=https://www.arrow.com/en/products/tja1042t1j/nxp-semiconductors?region=nac, Datasheet Link=http://www.nxp.com/docs/en/data-sheet/TJA1042.pdf, Height=1.75mm, Manufacturer_Part_Number=TJA1042T/1J, Mouser Price/Stock=https://www.mouser.co.uk/ProductDetail/NXP-Semiconductors/TJA1042T-1J?qs=gNSudQoqUYB5nZpx0evBtw%3D%3D
U7: "Integrated Circuit", Manufacturer_Name="Texas Instruments", Mouser Part Number=595-SN65HVD10DR, Arrow Part Number=SN65HVD10DR, Arrow Price/Stock=https://www.arrow.com/en/products/sn65hvd10dr/texas-instruments?region=nac, Datasheet Link=http://www.ti.com/lit/gpn/sn65hvd10, Height=1.75mm, Manufacturer_Part_Number=SN65HVD10DR, Mouser Price/Stock=https://www.mouser.co.uk/ProductDetail/Texas-Instruments/SN65HVD10DR?qs=QViXGNcIEAviyhAwS0yoXQ%3D%3D
U8: "Accelerometer", Manufacturer_Name=STMicroelectronics, Mouser Part Number=511-LSM6DSOTR, Arrow Part Number=LSM6DSOTR, Arrow Price/Stock=https://www.arrow.com/en/products/lsm6dsotr/stmicroelectronics?region=nac, Datasheet Link=https://www.st.com/resource/en/datasheet/lsm6dso.pdf, Manufacturer_Part_Number=LSM6DSOTR, Mouser Price/Stock=https://www.mouser.co.uk/ProductDetail/STMicroelectronics/LSM6DSOTR?qs=lc2O%252BfHJPVbD197C5c7oNw%3D%3D
U9: "Integrated Circuit", Manufacturer_Name="Analog Devices", Mouser Part Number=700-MAX9860ETGT, Arrow Part Number=MAX9860ETG+T, Arrow Price/Stock=https://www.arrow.com/en/products/max9860etgt/maxim-integrated?region=nac, Datasheet Link=https://datasheets.maximintegrated.com/en/ds/MAX9860.pdf, Height=0.8mm, Manufacturer_Part_Number=MAX9860ETG+T, Mouser Price/Stock=https://www.mouser.co.uk/ProductDetail/Analog-Devices-Maxim-Integrated/MAX9860ETG%2bT?qs=LHmEVA8xxfYGy2Ln2j7A4Q%3D%3D
U10: "Integrated Circuit", Arrow Part Number="W25Q16JVSSIQ TR", Manufacturer_Name=Winbond, Mouser Part Number=454-W25Q16JVSSIQTR, Arrow Price/Stock=https://www.arrow.com/en/products/w25q16jvssiqtr/winbond-electronics?region=nac, Datasheet Link=https://www.winbond.com/resource-files/w25q16jv%20spi%20revg%2003222018%20plus.pdf, Height=2.16mm, Manufacturer_Part_Number="W25Q16JVSSIQ TR", Mouser Price/Stock=https://www.mouser.co.uk/ProductDetail/Winbond/W25Q16JVSSIQ-TR?qs=qSfuJ%252Bfl%2Fd6oXlsNm7Svfg%3D%3D
XTAL1: "Crystal or Oscillator", Manufacturer_Name=ABRACON, Mouser Part Number=815-ABM3-8-D2Y-T, Arrow Part Number=ABM3-8.000MHZ-D2Y-T, Arrow Price/Stock=https://www.arrow.com/en/products/abm3-8.000mhz-d2y-t/abracon?region=europe, Datasheet Link=https://abracon.com/Resonators/abm3.pdf, Height=1.3mm, Manufacturer_Part_Number=ABM3-8.000MHZ-D2Y-T, Mouser Price/Stock=https://www.mouser.co.uk/ProductDetail/ABRACON/ABM3-8.000MHZ-D2Y-T?qs=ihRgKfnEsN4giUXjc3yS1g%3D%3D
XTAL2: "Crystal or Oscillator", Manufacturer_Name=ECS, Mouser Part Number=520-250-18-33-JGNT, Arrow Part Number=ECS-250-18-33-JGN-TR, Arrow Price/Stock=https://www.arrow.com/en/products/ecs-250-18-33-jgn-tr/ecs-international?region=nac, Datasheet Link=https://componentsearchengine.com/Datasheets/1/ECS-250-18-33-JGN-TR.pdf, Height=0.8mm, Manufacturer_Part_Number=ECS-250-18-33-JGN-TR, Mouser Price/Stock=https://www.mouser.co.uk/ProductDetail/ECS/ECS-250-18-33-JGN-TR?qs=AQlKX63v8RsjuKdEYMjMow%3D%3D

## Via types
v1: diameter 0.6, hole 0.3, GND-SIG1 to GND-SIG2, tented both sides, 88 vias
v2: diameter 0.5, hole 0.3, GND-SIG1 to GND-SIG2, tented both sides, 78 vias

## Nets (pads, with @x,y where several pads share a name; then routed paths per layer and width w, separated by ;. In a path a pad name is that pad's centre, name@x,y a point inside that pad or via, vN(x,y) a via of type N, cw(c..) or ccw(c..) an arc to the next point about the centre after c; other vN are vias at no path point)
+1v8: C10.2 C54.1 C55.1 C56.1 D3.2 U3.2 U9.6 U9.13 | length 8.9
  GND-SIG1 w0.254: v1(100.201,85.556) 101.101,85.556 D3.2@101.143,85.598
  GND-SIG1 w0.305: U9.6@105.009,32.467 105.011,32.465 105.011,31.776 105.259,31.529 105.259,31.443 105.791,30.911 C55.1@105.791,29.972 ; U9.13@105.009,36.367 105.009,36.868 105.6,37.459 105.6,37.919 105.791,38.11 105.791,39.687 105.546,39.932 v1(105.546,41.037)
  other v1: 105.259,31.449 103.524,88.569 102.127,89.585 99.112,89.68 103.524,90.728 102.049,90.939
+3v3: C7.2 C8.1 C9.1 C11.1 C12.1 C15.1 C16.1 C17.1 C18.1 C19.1 C20.1 C21.1 C24.1 C25.1 C26.1 C27.1 C28.1 C32.1 C33.1 C34.1 C35.1 C36.1 C43.1 C48.1 C49.1 C57.1 C58.1 D2.2 FB1.2 FB2.2 J5.1 J6.7 J6.8 R5.2 R7.2 R17.2 R19.2 R22.2 R33.1 R34.2 R35.2 R37.1 R38.1 R39.2 R40.2 R41.2 R42.2 R43.2 R44.2 U2.2 U3.3 U4.6 U4.11 U4.19 U4.28 U4.49 U4.50 U4.73 U4.75 U4.100 U5.9 U7.8 U8.2 U8.3 U8.5 U8.8 U9.11 U10.8 | length 94.5
  GND-SIG1 w0.254: v1@61.194,23.402 R19.2@62.158,23.402 ; v1(62.863,45.566) 62.907,45.521 R17.2@63.909,45.521 ; v1(63.111,81.843) 63.122,81.832 U10.8@65.913,81.832 ; U5.9@71.239,47.842 71.239,49.198 71.482,49.441 C43.1@71.482,50.845 ; v1(75.961,63.971) 75.963,63.973 78.168,63.973 U4.100@78.172,63.977 ; U4.75@79.852,77.657 v1@79.852,78.963 ; v1@79.975,79.103 80.79,79.103 80.852,79.041 U4.73@80.852,77.657 ; v1(82.342,59.881) 82.339,59.883 82.339,60.84 82.354,60.855 U4.6@82.354,62.295 U4.6@82.352,62.297 ; R22.2@83.356,23.376 84.32,23.376 v1@84.328,23.368 ; v1(84.452,60.748) 84.467,60.748 84.854,61.134 U4.11@84.854,62.295 ; v1(88.011,85.598) D2.2@89.078,85.598 ; U4.19@88.852,62.297 88.849,62.294 88.849,60.06 v1(88.862,60.046) ; U7.8@90.151,31.115 91.168,31.115 v1@91.19,31.138 ; U4.49@93.534,75.475 94.982,75.477 v1@95.246,75.741 ; U4.50@93.532,75.977 95.01,75.977 v1@95.246,75.741 ; U4.28@93.534,64.975 95.546,64.975 95.651,64.87 v1(95.744,64.87) ; v1(95.34,75.741) v1@95.246,75.741 ; v1(97.405,69.684) 97.427,69.707 97.933,69.707 ; v1(98.806,58.166) 98.831,58.191 FB1.2@98.831,59.248 ; R33.1@98.845,70.335 98.845,70.285 98.547,69.987 98.214,69.987 97.933,69.707 ; R34.2@98.857,69.088 98.857,69.138 98.559,69.436 98.204,69.436 97.933,69.707 ; R35.2@101.369,39.866 v1(101.369,40.969) ; U8.2@102.874,68.815 102.874,69.328 103.023,69.477 106.006,69.477 C48.1@106.162,69.322 ; U8.3@103.374,68.815 103.376,68.816 103.376,69.326 ; U8.8@103.874,71.139 103.874,72.412 C49.1@103.779,72.507 103.919,72.647 v1(103.919,73.57) ; U9.11@105.709,35.167 106.414,35.167 107.359,36.112 107.773,36.112 C57.1@107.993,36.332 ; R38.1@109.562,33.932 111.148,33.932 v1(111.76,34.544) 111.102,35.202 R37.1@109.562,35.202
  GND-SIG2 w0.254: R41.2@65.89,75.68 65.89,78.744 v1(65.955,78.809) ; R42.2@65.936,79.895 65.936,78.828 v1(65.955,78.809) ; R40.2@67.16,75.68 67.16,77.604 v1(65.955,78.809) ; R39.2@68.43,75.68 68.43,78.401 v1(68.463,78.433) 68.476,78.447 68.476,78.867 ; R43.2@68.476,79.895 68.476,78.867 ; R44.2@69.746,79.895 69.696,79.895 69.398,79.597 69.398,79.324 68.941,78.867 68.476,78.867 ; v1@71.501,66.294 73.776,66.294 R5.2@73.799,66.271 ; v1(75.961,63.971) v1@76.055,63.971 ; C19.1@77.254,63.349 77.254,63.713 77.245,63.722 76.304,63.722 v1@76.055,63.971 ; C24.1@77.278,64.619 77.278,64.279 77.245,64.246 76.329,64.246 v1@76.055,63.971 ; C25.1@79.357,77.686 79.357,78.532 v1@79.99,79.166 ; v1@79.97,79.117 80.392,79.117 ; C18.1@80.368,78.011 80.392,78.036 80.392,79.117 ; v1@80.814,79.117 80.392,79.117 ; v1@80.816,79.116 81.383,78.549 C20.1@81.383,77.703 ; C28.1@82.328,61.818 82.342,61.804 v1(82.342,59.881) ; v1(84.452,60.748) 84.519,60.814 84.613,60.814 84.856,61.056 84.856,61.817 C36.1@84.879,61.84 ; C35.1@88.148,61.829 88.148,60.678 88.78,60.046 v1(88.862,60.046) 89.418,60.602 C26.1@89.418,61.829 ; C21.1@93.98,74.295 93.98,74.345 94.303,74.668 94.49,74.668 94.851,75.029 v1(94.945,75.029) ; C17.1@93.98,75.692 94.006,75.718 v1@95.317,75.718 ; C27.1@93.98,77.089 93.98,77.039 94.303,76.716 94.639,76.716 95.274,76.082 95.274,75.807 v1(95.34,75.741) v1@95.317,75.718 ; C33.1@94,63.637 94,63.687 94.323,64.01 94.885,64.01 v1(95.744,64.87) 95.618,64.997 C34.1@94.011,64.997 ; C32.1@94.003,66.389 94.003,66.339 94.326,66.016 94.716,66.016 v1@95.676,65.056 ; v1@94.949,75.024 95.274,75.348 95.274,75.675 v1@95.317,75.718 ; v1(106.119,56.716) 107.091,56.716 R7.2@107.157,56.65
  other v1: 84.398,23.352 61.116,23.426 91.205,31.165 106.85,35.601 61.849,39.878 63.183,40.452 61.786,41.214 62.802,42.357 71.588,66.263 105.014,69.453 94.925,76.455 79.956,79.103 80.813,79.113 94.488,80.01 95.123,80.01 95.758,80.01 96.393,80.01 94.121,87.48 94.883,87.48 90.565,89.131 90.565,89.766 90.565,90.401 90.565,91.036
  other v2: 71.486,49.696
+5V: C4.1 C5.1 C6.1 C46.1 J6.5 J6.6 L1.2 R1.2 U2.3 U6.3 | length 6.7
  GND-SIG1 w0.254: v1(95.25,39.37) 95.274,39.346 95.274,38.453 C46.1@95.328,38.398 ; C46.1@95.3,38.37 C46.1@95.328,38.398 ; U6.3@95.32,36.544 95.328,36.552 C46.1@95.328,38.398
  GND-SIG1 w0.305: R1.2@64.158,93.206 64.208,93.206 64.481,93.479 64.481,93.707 65.007,94.234 v1(66.167,94.234) ; L1.2@79,90.651 L1.2@79.862,89.789
  other v1: 81.807,87.934 82.569,87.934 83.331,87.934 81.498,90.023
+24V: C1.1 C2.2 J6.1 J6.2 U1.4 U1.5
+AVDD-VREF: C13.1 C14.1 C22.1 C23.1 FB1.1 U4.21 U4.22 | length 11.2
  GND-SIG1 w0.254: U4.21@89.852,62.297 89.852,61.151 90.043,60.96 ; 90.043,60.579 90.043,60.96 ; U4.22@90.344,62.289 90.344,61.261 90.043,60.96
  GND-SIG1 w0.305: 90.043,60.579 90.043,59.563 90.332,59.274 C22.1@91.233,59.274 91.245,59.262 92.581,59.262 C14.1@92.593,59.25 ; 93.118,59.25 C23.1@94.092,59.25 C13.1@95.556,59.25 95.558,59.249 FB1.1@97.331,59.248 FB1.1@97.331,59.248
ACT: J1.10 U5.3 | length 29.5
  GND-SIG1 w0.254: J1.10@68.691,23.421 78.537,33.267 78.537,39.446 78.105,39.878 77.323,40.66 v2(77.323,40.667) ; U5.3@72.939,45.642 72.962,45.619 73.66,45.619 73.794,45.485 v2@73.888,45.485
  GND-SIG2 w0.254: v2(73.867,45.464) 74.678,45.464 75.692,44.45 75.692,42.297 v2(77.323,40.667)
AVDD: C37.1 C39.1 C40.1 FB2.1 J1.4 J1.5 R10.2 R11.2 R12.2 R13.2 R21.1 U5.1 U5.19 | length 26.7
  GND-SIG1 w0.254: C39.1@65.47,44.151 65.515,44.196 66.294,44.196 66.875,43.615 v1(68.234,43.615) ; R21.1@67.668,52.412 67.862,52.606 67.862,53.533 v1(67.886,53.557) ; v1(68.255,42.05) 68.245,42.061 68.245,43.604 v1(68.234,43.615) ; U5.19@69.739,43.942 69.739,43.667 69.716,43.644 68.264,43.644 v1(68.234,43.615) ; U5.1@72.939,44.642 73.214,44.642 73.237,44.619 73.237,44.462 73.629,44.071 74.815,44.071 v1(74.827,44.059) 75.868,44.059 C40.1@76.187,44.377
  GND-SIG2 w0.254: R10.2@68.33,40.983 68.255,41.058 v1(68.255,42.05) 68.266,42.061 69.62,42.061 ; R11.2@69.62,40.978 69.62,42.061 ; R12.2@71.097,41.009 71.097,42.061 ; C37.1@72.4,39.604 72.136,39.339 72.136,37.211 73.286,36.061 73.286,34.791 J1.5@73.406,34.671 ; R13.2@73.891,41.009 73.891,41.85 73.68,42.061 71.097,42.061 ; 69.62,42.061 71.097,42.061
  other v1: 65.596,40.071 66.358,40.071 66.993,40.452 66.993,41.214 66.993,41.976
BOOT0: R5.1 R6.2 U4.94 | length 5.1
  GND-SIG1 w0.254: v2@76.533,66.977 U4.94@78.172,66.977
  GND-SIG2 w0.254: R5.1@75.399,66.258 75.399,66.223 R5.1@75.697,65.925 ; R5.1@75.399,66.271 75.532,66.404 76.056,66.404 76.581,66.929 76.581,67.183 76.073,67.691 75.452,67.691 R6.2@75.449,67.694
  other v2: 76.588,66.988
CAN_N: J2.2 R28.1 R31.1 U6.6 | length 15.6
  GND-SIG1 w0.093: J2.2@94.955,22.823 95.809,22.823 95.864,22.878 95.864,27.81 95.864,29.402 95.809,29.456 R28.1@95.107,29.456 95.32,29.669 95.809,29.669 95.864,29.724 95.864,30.02 95.864,31.065 95.809,31.12 U6.6@95.32,31.12
  GND-SIG2 w0.093: J2.2@94.955,22.823 95.809,22.823 95.864,22.878 95.864,24.512 95.865,24.514 95.865,25.825 95.81,25.88 95.654,25.88 R31.1@95.29,26.244
CAN_P: J2.1 R28.2 R32.2 U6.7 | length 15.4
  GND-SIG1 w0.093: U6.7@96.59,31.12 96.102,31.12 96.047,31.065 96.047,29.945 96.047,29.724 96.102,29.669 96.494,29.669 R28.2@96.707,29.456 96.102,29.456 96.047,29.402 96.047,27.886 96.047,22.878 96.102,22.823 J2.1@96.955,22.823
  GND-SIG2 w0.093: R32.2@96.627,26.234 96.267,25.874 96.103,25.874 96.048,25.82 96.048,24.438 96.047,24.436 96.047,22.878 96.102,22.823 J2.1@96.955,22.823
ETHRX_N: J1.6 R13.1 U5.22 | length 11.4
  GND-SIG1 w0.093: U5.22@71.239,43.942 71.239,43.667 71.342,43.564 71.397,43.509 71.397,41.246 72.973,39.67 72.973,38.441 v2(72.985,38.429) ; J1.6@74.438,37.17 74.536,37.071 J1.6@74.635,37.17
  GND-SIG2 w0.093: v2(72.985,38.429) 73.029,38.386 73.029,38.096 73.85,37.275 74.53,37.275 74.635,37.17 74.635,38.014 73.891,38.758 R13.1@73.891,39.409
ETHRX_P: J1.3 R12.1 U5.23 | length 16.2
  GND-SIG1 w0.093: J1.3@70.825,34.63 70.969,34.63 73.409,37.07 73.409,39.494 71.581,41.322 71.581,43.509 71.635,43.564 71.739,43.667 U5.23@71.739,43.942
  GND-SIG2 w0.093: J1.3@70.825,34.63 70.958,34.763 70.958,39.27 R12.1@71.097,39.409
ETHTX_N: J1.2 R11.1 U5.20 | length 12.7
  GND-SIG1 w0.093: J1.2@69.596,37.211 69.555,37.17 69.514,37.129 69.533,37.109 69.533,36.427 69.822,36.137 69.9,36.137 70.397,36.635 70.397,43.509 70.343,43.564 70.239,43.667 U5.20@70.239,43.942
  GND-SIG2 w0.093: J1.2@69.555,37.17 69.339,37.385 68.77,37.385 68.716,37.44 68.716,38.109 69.066,38.459 69.066,38.945 69.12,39 69.242,39 R11.1@69.62,39.378
ETHTX_P: J1.1 R10.1 U5.21 | length 15.8
  GND-SIG1 w0.093: J1.1@68.326,34.671 68.927,35.272 69.293,35.272 70.581,36.559 70.581,43.509 U5.21@70.635,43.564 ; U5.21@70.636,43.564 70.739,43.667 U5.21@70.739,43.942
  GND-SIG2 w0.093: J1.1@68.285,34.63 68.453,34.798 68.453,38.105 68.882,38.535 68.882,38.95 68.828,39.005 68.708,39.005 R10.1@68.33,39.383
FB: R1.1 R2.2 U1.3 | length 4.3
  GND-SIG1 w0.305: R2.2@62.229,91.606 62.279,91.606 62.551,91.333 62.551,90.997 63.185,90.363 ; U1.3@63.185,89.388 63.185,89.536 63.185,89.738 63.185,90.363 ; R1.1@64.158,91.606 64.108,91.606 63.835,91.333 63.835,91.013 63.185,90.363
GND: C1.2 C2.1 C4.2 C5.2 C6.2 C7.1 C8.2 C9.2 C10.1 C11.2 C12.2 C13.2 C14.2 C15.2 C16.2 C17.2 C18.2 C19.2 C20.2 C21.2 C22.2 C23.2 C24.2 C25.2 C26.2 C27.2 C28.2 C29.2 C30.2 C31.2 C32.2 C33.2 C34.2 C35.2 C36.2 C37.2 C38.2 C39.2 C40.2 C41.2 C42.1 C43.2 C44.2 C45.2 C46.2 C47.2 C48.2 C49.2 C50.1 C51.2 C52.2 C53.1 C54.2 C55.2 C56.2 C57.2 C58.2 D1.2 J1.7 J1.8 J1.15 J1.16 J5.2 J5.4 J5.6 J5.8 J5.10 J5.12 J5.14 J5.16 J5.18 J5.20 J5.22 J5.24 J5.26 J5.28 J5.30 J5.32 J5.34 J5.36 J5.38 J5.40 J5.42 J5.44 J6.3 J6.4 J6.9 J6.10 J6.12 J6.14 J6.16 J6.18 J6.20 J6.22 J6.24 J6.26 J6.28 J6.30 J6.32 J6.34 J6.36 J6.38 J6.40 J6.42 J6.44 R2.1 R3.1 R4.1 R6.1 R26.1 R36.1 R50.1 U1.2 U2.1 U3.1 U4.10 U4.20 U4.27 U4.74 U4.99 U5.25 U6.2 U7.5 U8.6 U8.7 U9.5 U9.12 U9.24 U9.25 U10.4 XTAL2.2 XTAL2.4 | length 5.7
  GND-SIG1 w0.254: U6.2@96.65,36.524 C46.2@96.65,38.37 v1@96.65,39.439 ; U8.6@104.037,69.977 U8.7@104.037,70.477 v1(105.002,70.477) 105.967,70.477 C48.2@106.224,70.734
  other v1: 102.87,33.618 104.648,33.618 103.759,34.38 102.87,35.269 104.648,35.269 96.658,39.447 70.104,45.048 71.882,45.048 70.993,45.937 70.104,46.699 71.882,46.699
LINK: J1.11 U5.2 | length 25.1
  GND-SIG1 w0.254: U5.2@72.939,45.142 72.962,45.119 73.403,45.119 73.89,44.632 v2@73.919,44.632
  GND-SIG2 w0.254: v2(73.898,44.611) 73.898,43.45 75.992,41.356 75.992,36.438 77.47,34.959 77.47,32.245 75.692,30.467 75.692,24.59 J1.11@76.861,23.421
LX: C3.2 D1.1 L1.1 U1.6
NetC3_1: C3.1 U1.1 | length 2.4
  GND-SIG1 w0.305: U1.1@65.085,89.388 65.085,89.261 65.233,89.113 C3.1@67.25,89.113
NetC29_1: C29.1 J5.17 R7.1 U4.14 | length 35.4
  GND-SIG1 w0.254: U4.14@86.352,62.297 86.352,60.996 86.681,60.667 v1(86.681,60.573) 87.122,60.132 87.122,58.928 91.22,54.83 96.775,54.83 96.922,54.976 v2(96.988,54.976) ; v2(107.344,58.394) 107.391,58.347 107.642,58.347 109.281,56.708 J5.17@111.03,56.708
  GND-SIG2 w0.254: C29.1@86.243,61.829 86.351,61.721 86.401,61.721 86.616,61.506 86.616,60.637 v1(86.681,60.573) 86.681,60.48 v1@86.814,60.346 ; v2(96.988,54.976) 97.003,54.976 99.176,57.15 103.759,57.15 105.003,58.394 v2(107.344,58.394) ; R7.1@108.881,56.619 108.97,56.708 J5.17@111.03,56.708
NetC30_1: C30.1 R9.1 XTAL1.2 | length 5.8
  GND-SIG1 w0.254: R9.1@86.219,55.852 86.219,54.975 86.594,54.6 86.788,54.6 87.611,53.777 XTAL1.2@87.611,53.527 88.299,54.215 C30.1@90.1,54.215